# Altium PCB Markovic_Mario.PcbDoc
Units mm, origin at the board's own origin, x right, y up, seen from the top; angles counter-clockwise.
Board outline 76 x 70 mm, 2 copper layers (Top Layer, Bottom Layer); 37 components, 24 nets, 129 pads, 0 vias.
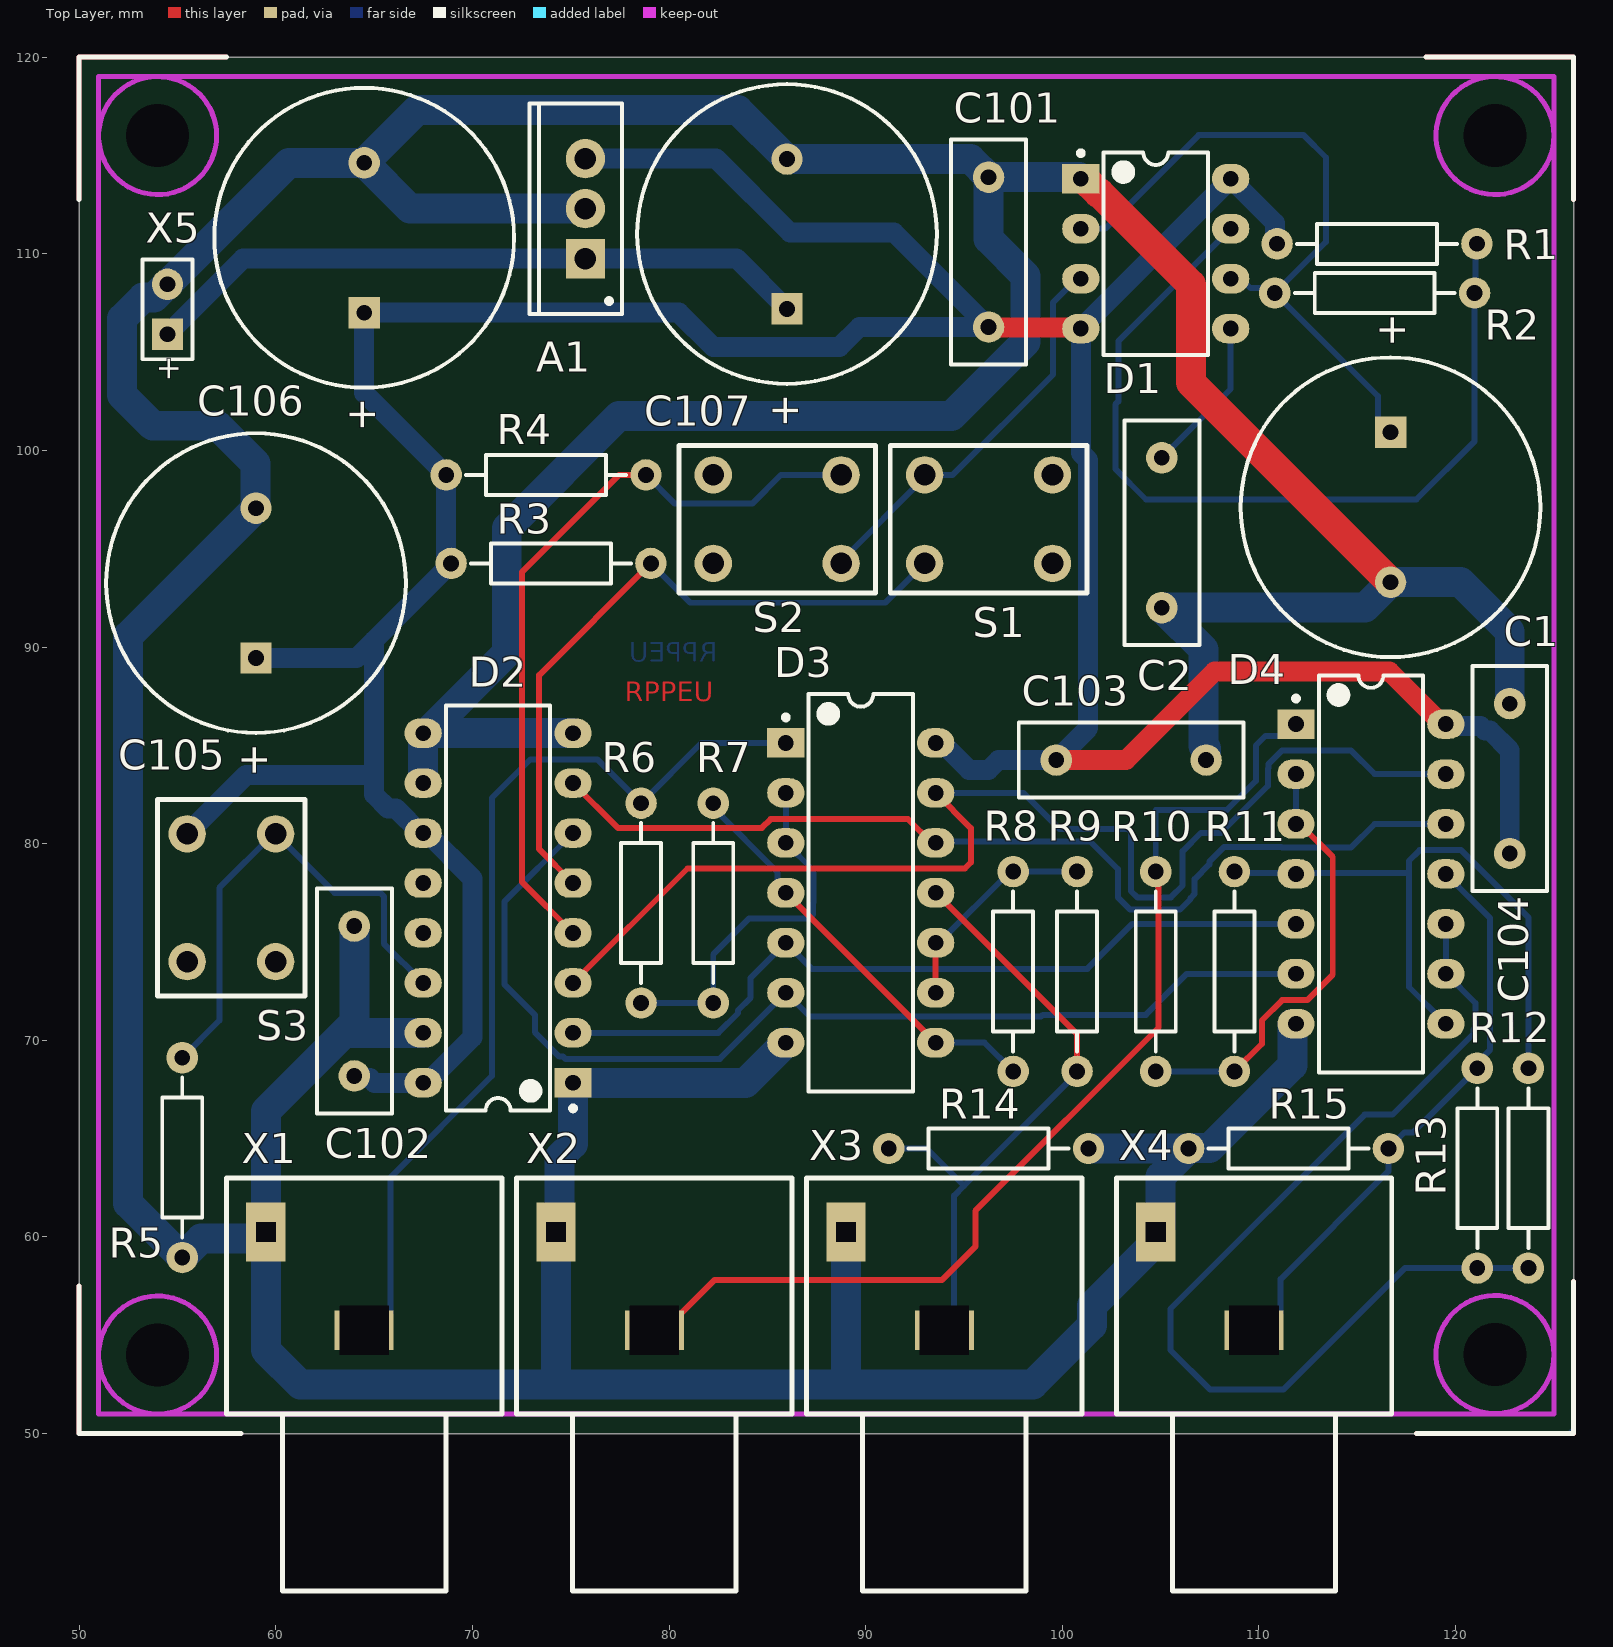
[diagram p0: Top Layer view]
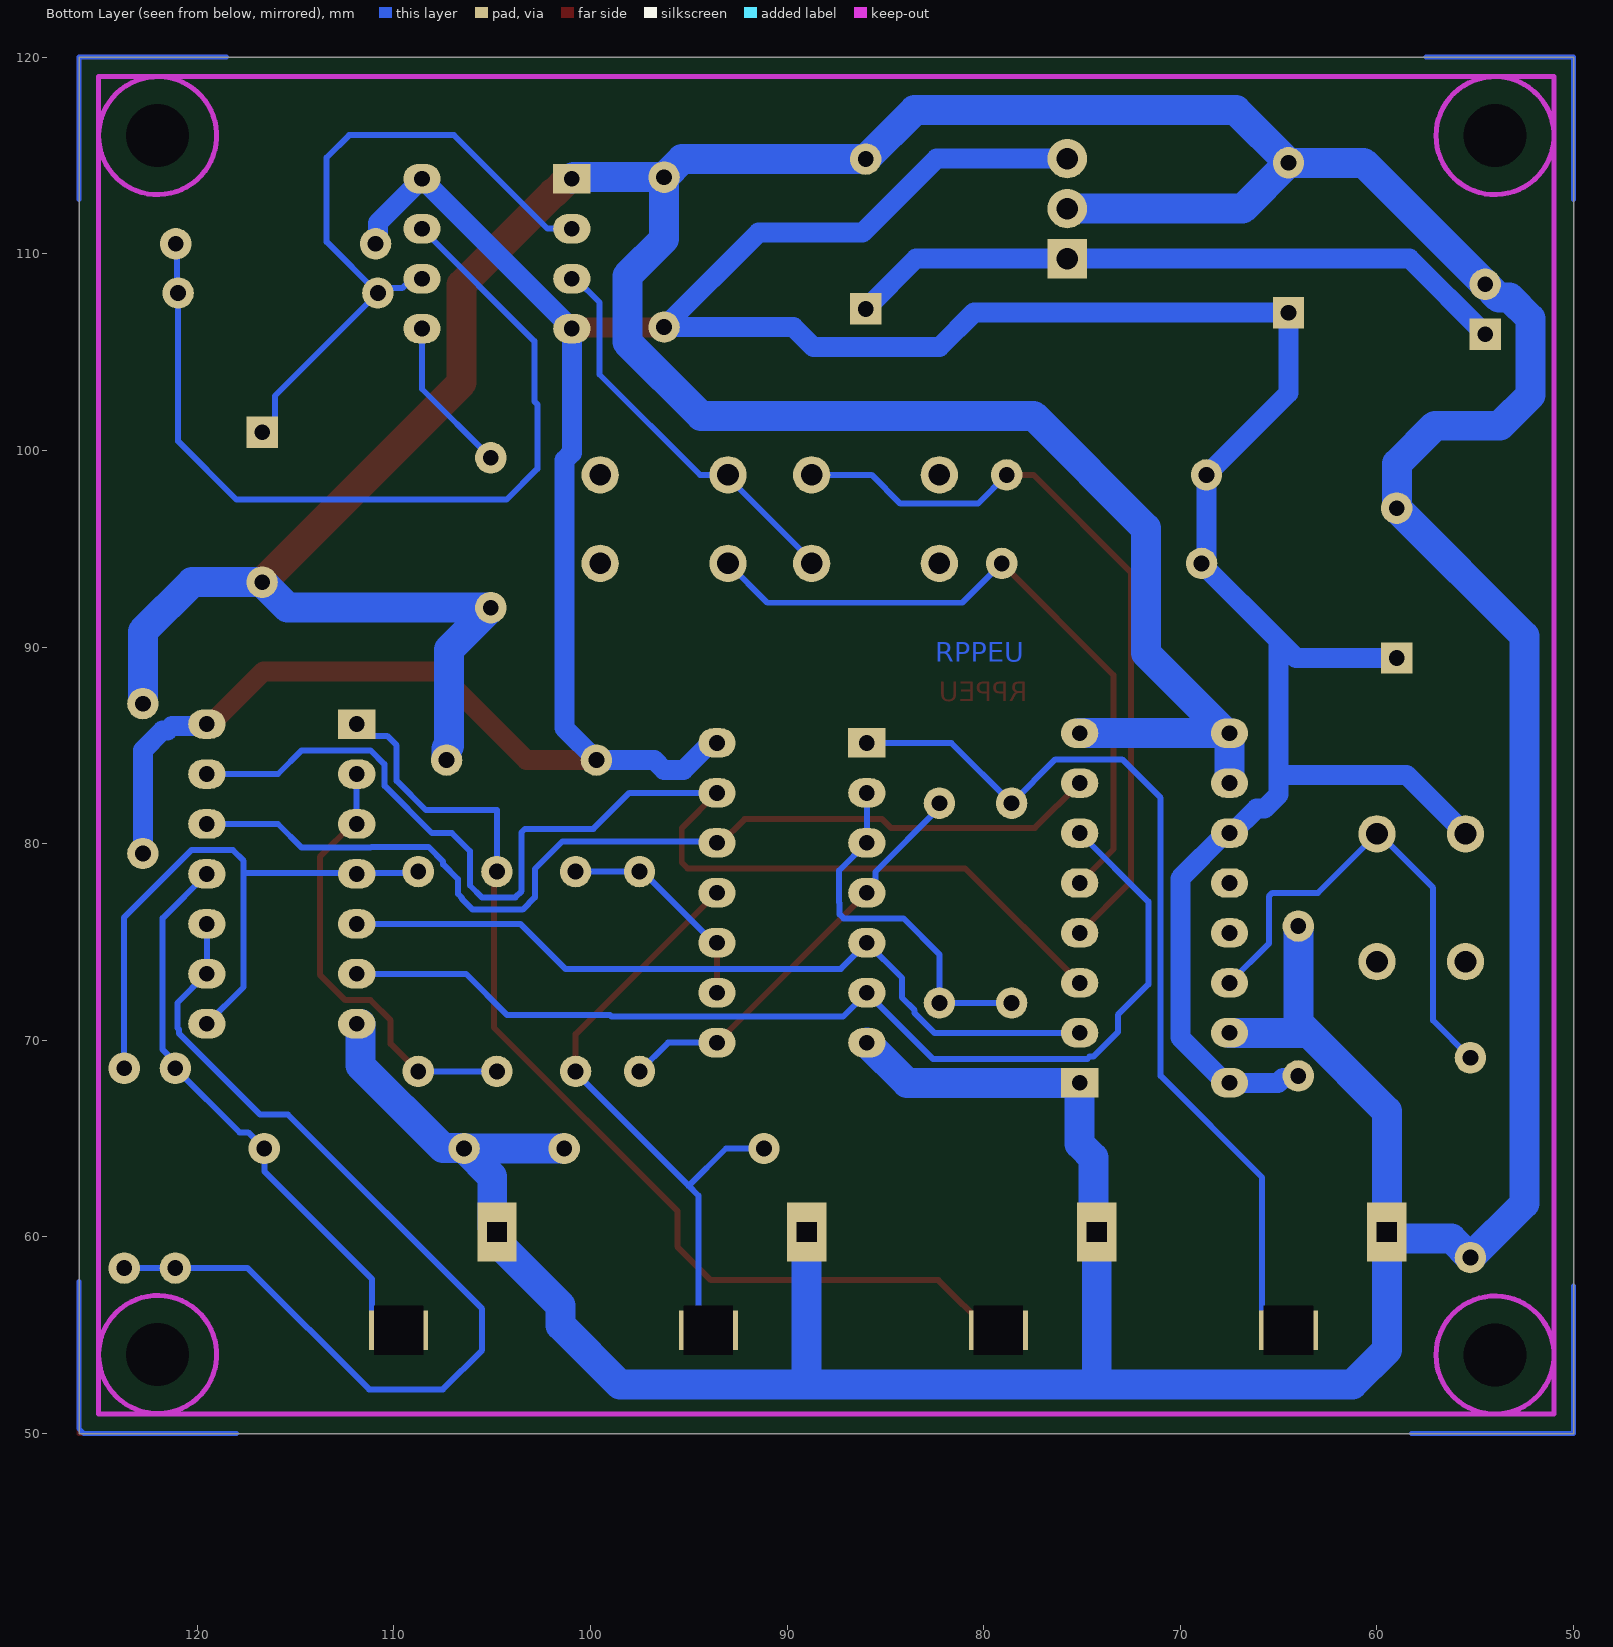
[diagram p1: Bottom Layer view, seen from below]

## Layer stack, top to bottom
Top Solder: solder mask 0.0102, Solder Resist, Dk 3.5
Top Layer: signal copper 0.0356
Dielectric 1: dielectric 0.32, FR-4, Dk 4.8
Bottom Layer: signal copper 0.0356
Bottom Solder: solder mask 0.0102, Solder Resist, Dk 3.5

## Board outline
50,50 50,120 126,120 126,50

## Design rules (kind name [scope] priority, off if disabled: settings)
Clearance [All] p1: gap=0.305 ignorepadtopadclearanceinfootprint=FALSE except(0: Arc-Hole Track-Hole SMDPad-Hole THPad-Hole Via-Hole Fill-Hole Poly-Hole Region-Hole Text-Hole)
HoleSize [All] p1: absolutevalues=TRUE maxlimit=3.2 minlimit=0.025 maxpercent=80.000 minpercent=20.000
MinimumSolderMaskSliver [All] p1: minsoldermaskwidth=0.051
PolygonConnect [All] p1: connectstyle=Relief reliefconductorwidth=0.254 reliefentries=4 polygonreliefangle="90 Angle" airgapwidth=0.254
RoutingVias [All] p1: holewidth=0.711 width=1.27 viastyle="Through Hole" minholewidth=0.711 minwidth=1.27 maxholewidth=0.711 maxwidth=1.27
SilkToSolderMaskClearance [IsPad] p1: minsilkscreentomaskgap=0.051 clearancetoexposedcopper=TRUE
SolderMaskExpansion [All] p1: expansion=0.102
Width [All] p1: maxlimit=1.524 minlimit=0.305 preferedwidth=0.305 minimp=50.000000 maximp=50.000000 favimp=50.000000
27 further rules are at their usual default settings.

## Components (designator, comment, footprint, x,y, rotation, side; value= is the part's Value field where it differs from the comment)
A1 "UA7805" TO-220AB 75.75,112.29 r90 top
C1 "1u/25V" RB7.6-15 116.688,97.104 r90 top value=1u
C2 "100n" RAD-0.3 105.06,95.81 r90 top
C101 "100n" RAD-0.3 96.25,110.08 r270 top
C102 "100n" RAD-0.3 64,72 r270 top
C103 "100n" RAD-0.3 103.5,84.25 r180 top
C104 "100n" RAD-0.3 122.75,83.31 r270 top
C105 "10u/Ta" RB7.6-15 59,93.25 r270 top value=10u
C106 "100u/Al" RB7.6-15 64.5,110.81 r270 top value=100u
C107 "330u/Al" RB7.6-15 86,111 r270 top value=330u
D1 "7555" DIP-8 104.75,110 r0 top
D2 "74193" DIP-16 71.31,76.73 r180 top
D3 "4066" DIP-14 89.75,77.5 r0 top
D4 "4066" DIP-14 115.69,78.46 r0 top
R1 "150K" AXIAL-0.4 116,110.5 r0 top
R2 "330K" AXIAL-0.4 115.882,108 r0 top
R3 "560" AXIAL-0.4 74,94.25 r180 top
R4 "560" AXIAL-0.4 73.75,98.75 r180 top
R5 "560" AXIAL-0.4 55.25,64.036 r90 top
R6 "1K" AXIAL-0.4 78.58,76.98 r90 top
R7 "2K" AXIAL-0.4 82.25,76.98 r270 top
R8 "4K7" AXIAL-0.4 97.5,73.5 r270 top
R9 "8K2" AXIAL-0.4 100.75,73.5 r90 top
R10 "1K" AXIAL-0.4 104.75,73.5 r90 top
R11 "2K" AXIAL-0.4 108.75,73.5 r270 top
R12 "4K7" AXIAL-0.4 123.7,63.5 r90 top
R13 "8K2" AXIAL-0.4 121.1,63.5 r270 top
R14 "4K7" AXIAL-0.4 96.25,64.5 r180 top
R15 "4K7" AXIAL-0.4 111.5,64.5 r0 top
S1 "UP" SWITCH 93,98.75 r0 top
S2 "DOWN" SWITCH 88.75,94.25 r180 top
S3 "RST" SWITCH 60,80.5 r270 top
X1 "INPUT" JACK 64.5,55.25 r90 top
X2 "INPUT" JACK 79.25,55.25 r90 top
X3 "OUTPUT" JACK 94,55.25 r90 top
X4 "OUTPUT" JACK 109.75,55.25 r90 top
X5 "Napajanje" BAT-2 54.5,107.17 r90 top

## Footprints (in the part's own frame and the unit in brackets; to place one, negate y for a bottom-side part, rotate by r counter-clockwise, add the part's x,y. Pads: shape width x height; smd on the part's side, far side on the other; paste and mask are expansions set on the pad)
AXIAL-0.4 [mm] "Axial Device, Thru-Hole; 2 Leads; 0.4 in Pin Spacing"
  round 1.6 hole 0.8: 1(-5.08,0) 2(5.08,0)
  silkscreen extent -4.06,-1.02 4.06,1.02
BAT-2 [mm] "Battery; 2 Leads"
  rect 1.6x1.6 hole 0.8: 1(-1.27,0)
  round 1.6 hole 0.8: 2(1.27,0)
  silkscreen extent -2.54,-1.27 2.54,1.27
DIP-8 [mm] "DIP; 8 Leads; Row Spacing 7.62 mm; Pitch 2.54 mm"
  rect 1.9x1.5 hole 0.8: 1(-3.81,3.81)
  oval 1.9x1.5 hole 0.8: 2(-3.81,1.27) 3(-3.81,-1.27) 4(-3.81,-3.81) 5(3.81,-3.81) 6(3.81,-1.27) 7(3.81,1.27) 8(3.81,3.81)
  silkscreen extent -3.93,-5.15 2.65,5.23, body extent -3.6,-5.15 3.6,5.15, height 5.08
DIP-14 [mm] "DIP; 14 Leads; Row Spacing 7.62 mm; Pitch 2.54 mm"
  rect 1.9x1.5 hole 0.8: 1(-3.81,7.62)
  oval 1.9x1.5 hole 0.8: 2(-3.81,5.08) 3(-3.81,2.54) 4(-3.81,0) 5(-3.81,-2.54) 6(-3.81,-5.08) 7(-3.81,-7.62) 8(3.81,-7.62) 9(3.81,-5.08) 10(3.81,-2.54) 11(3.81,0) 12(3.81,2.54) 13(3.81,5.08) 14(3.81,7.62)
  silkscreen extent -3.93,-10.1 2.65,10.1, body extent -3.6,-10.1 3.6,10.1, height 5.08
DIP-16 [mm] "DIP; 16 Leads; Row Spacing 7.62 mm; Pitch 2.54 mm"
  rect 1.9x1.5 hole 0.8: 1(-3.81,8.89)
  oval 1.9x1.5 hole 0.8: 2(-3.81,6.35) 3(-3.81,3.81) 4(-3.81,1.27) 5(-3.81,-1.27) 6(-3.81,-3.81) 7(-3.81,-6.35) 8(-3.81,-8.89) 9(3.81,-8.89) 10(3.81,-6.35) 11(3.81,-3.81) 12(3.81,-1.27) 13(3.81,1.27) 14(3.81,3.81) 15(3.81,6.35) 16(3.81,8.89)
  silkscreen extent -3.94,-10.3 2.65,10.31, body extent -3.6,-10.28 3.6,10.28, height 5.08
JACK [mm]
  rect 2x3 hole 2.5 square: 1(0,0)
  rect 3x2 hole 1 square: 2(5,5)
  silkscreen extent -13.25,-7 7.75,7
RAD-0.3 [mm] "Radial Cap, Thru-Hole; 2 Leads; 0.3 in Pin Spacing"
  round 1.6 hole 0.8: 1(-3.81,0) 2(3.81,0)
  silkscreen extent -5.71,-1.91 5.71,1.91
RB7.6-15 [mm] "Polarized Capacitor (Radial); 2 Leads"
  rect 1.6x1.6 hole 0.8: 1(3.81,0)
  round 1.6 hole 0.8: 2(-3.81,0)
  silkscreen extent -7.62,-7.62 7.62,7.62
SWITCH [mm]
  round 1.9 hole 1.1: 1(0,0) 2(0,-4.5) 3(6.5,0) 4(6.5,-4.5)
  silkscreen extent -1.75,-6 8.25,1.5
TO-220AB [mm] "TO, Thru-Hole, Vertical, Heatsink Mounted; 3 In-Line Leads; Pitch 2.54 mm"
  rect 2x2 hole 1.1: 1(-2.54,0)
  round 2 hole 1.1: 2(0,0) 3(2.54,0)
  silkscreen extent -5.35,-1.85 5.35,2.85, body extent -5.4,-1.9 5.4,2.9, height 19.3

## Part data
A1: library part "Volt Reg", "Voltage Regulator", Cijena="4.68 kn", Katalog dobavljaèa=Farnell, Kataloški broj=2075448, Opis komponente="Linear Voltage Regulator, 7805, Fixed, 7V To 25V In, 5V And 1.5A Out", PackageReference=D2PAK, Proizvoðaè="TEXAS INSTRUMENTS"
C1: library part "Cap Pol1", "Polarized Capacitor (Radial)", Cijena="2.73 kn", Katalog dobavljaèa=Farnell, Kataloški broj=3322208, Opis komponente="CERAMIC CAPACITOR, 1UF, 25V, Y5V, +80,-20%, RADIAL", PackageReference=RB7.6-15, Proizvoðaè=VISHAY
C2 C101 C102 C103 C104: library part Cap, "Capacitor", Cijena="2.06 kn", Katalog dobavljaèa=Farnell, Kataloški broj=1457699, Opis komponente="Multilayer Ceramic Capacitor, Gold Max, 0.1 µF, 50 V, Goldmax, 300 Series, ± 10%, Radial Leaded", PackageReference=RAD-0.3, Proizvoðaè=KEMET
C105 C106 C107: library part "Elektrolitski kondenzator", Katalog dobavljaèa=Farnell
  C105: Cijena="5.35 kn", Kataloški broj=9708200, Opis komponente="Tantalum Capacitor, Epoxy-Coated, 10 µF, 6.3 V, MCCB Series, ± 20%, Radial Leaded, 5.1 mm", Proizvoðaè=MULTICOMP
  C106: Cijena="1.77 kn", Kataloški broj=2068653, Opis komponente="SMD Aluminium Electrolytic Capacitor, Radial Can - SMD, 100 µF, 16 V, EDK Series", Proizvoðaè=KEMET
  C107: Cijena="5.25 kn", Kataloški broj=9695796, Opis komponente="SMD Aluminium Electrolytic Capacitor, Radial Can - SMD, 330 µF, 25 V, FK Series", Proizvoðaè=PANASONIC
R1 R2 R3 R4 R5 R6 R7 R8 R9 R10 R11 R12 R13 R14 R15: library part Res2, "Resistor", Cijena="0.26 kn", Katalog dobavljaèa=Farnell, PackageReference=AXIAL-0.4, Proizvoðaè=MULTICOMP
  R1: Kataloški broj=9341340, Opis komponente="Through Hole Resistor, 150 kohm, MF25 Series, 250 mW, ± 1%, Axial Leaded, 250 V"
  R2: Kataloški broj=9341765, Opis komponente="Through Hole Resistor, 330 kohm, MF25 Series, 250 mW, ± 1%, Axial Leaded, 250 V"
  R3 R4 R5: Kataloški broj=9342052, Opis komponente="Through Hole Resistor, 560 ohm, MF25 Series, 250 mW, ± 1%, Axial Leaded, 250 V"
  R6 R10: Kataloški broj=9341102, Opis komponente="Through Hole Resistor, 1 kohm, MF25 Series, 250 mW, ± 1%, Axial Leaded, 250 V"
  R7 R11: Kataloški broj=9341480, Opis komponente="Through Hole Resistor, 2 kohm, MF25 Series, 250 mW, ± 1%, Axial Leaded, 250 V"
  R8 R12 R14 R15: Kataloški broj=9341951, Opis komponente="Through Hole Resistor, 4.7 kohm, MF25 Series, 250 mW, ± 1%, Axial Leaded, 250 V"
  R9 R13: Kataloški broj=9342273, Opis komponente="Through Hole Resistor, 8.2 kohm, MF25 Series, 250 mW, ± 1%, Axial Leaded, 250 V"
S1 S2 S3: library part SW-PB, "Switch", Cijena="1.21 kn", Katalog dobavljaèa=Farnell, Kataloški broj=9471731, Opis komponente="Tactile Switch, MCDTS6 Series, Top Actuated, Through Hole, Round Button, 160 gf, 50mA at 12VDC", PackageReference=SPST-2, Proizvoðaè=MULTICOMP
X1 X2 X3 X4: library part Konektor, Cijena="4.41 kn", Katalog dobavljaèa=Farnell, Kataloški broj=2817595, Opis komponente="RCA (Phono) Audio / Video Connector, PCB, 1 Position, 2 Contacts, Jack", Proizvoðaè="CLIFF ELECTRONIC COMPONENTS"
X5: library part "Header 2", "Header, 2-Pin", Cijena="4.53 kn", Katalog dobavljaèa=Farnell, Kataloški broj=2112482, Opis komponente="Wire-To-Board Terminal Block, 2.54 mm, 2 Ways, 30 AWG, 16 AWG, 1.4 mm2", Proizvoðaè="BUCHANAN - TE CONNECTIVITY"
D1: Cijena="7.05 kn", Katalog dobavljaèa=Farnell, Kataloški broj=1564692, Opis komponente="Timer, Oscillator & Pulse Generator IC", Proizvoðaè="TEXAS INSTRUMENTS"
D2: Cijena="3.14 kn", Katalog dobavljaèa=Farnell, Kataloški broj=1470793, Opis komponente="Binary Synchronous Up / Down Counter", Proizvoðaè="TEXAS INSTRUMENTS"
D3 D4: Cijena="3.51 kn", Katalog dobavljaèa=Farnell, Kataloški broj=2136906, Opis komponente="ANALOG SWITCH", Proizvoðaè="TEXAS INSTRUMENTS"

## Free pads (board coordinates)
  round 3 hole 3.2: 0(54,54) 0(54,116) 0(122,54.025) 0(122,116)

## Nets (pads, with @x,y where several pads share a name; then routed paths per layer and width w, separated by ;. In a path a pad name is that pad's centre, name@x,y a point inside that pad or via, vN(x,y) a via of type N, cw(c..) or ccw(c..) an arc to the next point about the centre after c; other vN are vias at no path point)
A: D2.3 D3.13 D4.13 | length 62.2
  Top Layer w0.305: D2.3 80.94,78.74 95.047,78.74 95.352,79.045 95.352,80.788 D3.13
  Bottom Layer w0.305: D3.13 98.014,82.58 99.844,80.75 103.321,80.75 103.5,80.571 103.5,79.108 103.493,79.101 103.493,77.584 103.81,77.267 105.517,77.267 106.121,77.871 106.121,79.621 107.04,80.54 108.057,80.54 110.46,82.943 110.46,83.827 110.473,83.84 110.473,84.04 111.18,84.747 114.675,84.747 115.882,83.54 D4.13
B: D2.2 D3.5 D4.5 | length 40.8
  Bottom Layer w0.305: D2.2 82.508,70.38 83.507,71.379 83.507,71.521 84.153,72.167 84.153,73.173 D3.5 87.265,73.635 101.27,73.635 103.555,75.92 D4.5
C: D2.6 D3.6 D4.6 | length 54.3
  Bottom Layer w0.305: D2.6 71.628,77.048 71.628,72.847 73.179,71.296 73.179,70.414 74.42,69.173 74.62,69.173 74.73,69.063 82.583,69.063 D3.6 87.147,71.213 98.924,71.213 99.009,71.298 104.242,71.298 106.324,73.38 D4.6
D: D2.7 D3.12 D4.12 | length 50.7
  Top Layer w0.305: D2.7 77.397,80.803 84.722,80.803 85.167,81.247 92.153,81.247 93.36,80.04 D3.12
  Bottom Layer w0.305: D3.12 93.632,80.112 101.422,80.112 102.819,78.715 102.819,77.267 103.446,76.64 105.981,76.64 106.517,77.176 106.517,77.231 106.731,77.445 106.731,78.197 107.48,78.947 107.48,79.088 108.229,79.837 111.136,79.837 111.18,79.793 114.675,79.793 115.882,81 D4.12
GND: A1.2 C1.2 C2.1 C101.1 C102.1 C103.1 C104.1 C105.2 C106.2 C107.2 D1.1 D2.1 D2.8 D2.9 D2.10 D2.15 D3.7 D4.7 R5.1 R14.1 R15.1 X1.2 X2.2 X3.2 X4.2 X5.2 | length 380.4
  Top Layer w1.524: D1.1 101.116,113.81 101.839,113.087 101.893,113.087 106.543,108.436 106.543,103.439 C1.2
  Bottom Layer w1.524: C102.1 64,70.9 63.48,70.38 ; D2.15 63.48,70.38 ; D2.10 D2.9 D2.9@67.676,85.62 ; D2.8 D2.9@67.676,85.62 ; A1.2 66.83,112.29 C106.2 ; D3.7 83.9,67.84 D2.1 75.12,64.73 74.426,64.036 74.426,60.426 X2.2 74.25,52.5 ; X3.2 89,52.5 ; D1.1 100.86,113.89 C101.1 ; R14.1 R15.1 ; C103.1 107.31,84.829 107.175,84.964 107.175,89.885 C2.1 115.393,92 C1.2 120.25,93.294 122.75,90.794 C104.1 ; D4.7 111.704,70.84 111.692,70.828 111.692,68.722 107.485,64.515 106.435,64.515 R15.1 ; X1.2@59.5,60.158 X1.2 59.5,66.4 63.48,70.38 ; X1.2@59.5,60.158 59.5,54.25 61.25,52.5 74.25,52.5 ; X1.2@59.5,60.158 59.262,59.92 56.214,59.92 R5.1 52.5,61.706 52.5,90.56 C105.2 58.985,97.075 58.985,99.325 57.06,101.25 53.75,101.25 52.194,102.806 52.194,106.702 53.258,107.767 53.806,107.767 54.479,108.44 X5.2 60.68,114.62 C106.2 ; C106.2 67.18,117.3 83.51,117.3 C107.2 95.33,114.81 C101.1 ; D2.9@67.676,85.62 71.75,89.694 71.75,96.04 77.46,101.75 94.37,101.75 98.117,105.497 98.117,108.876 96.25,110.743 C101.1 ; 74.25,52.5 89,52.5 ; 89,52.5 98.5,52.5 101.506,55.506 101.506,56.506 104.75,59.75 X4.2 104.988,60.488 104.988,63.068 R15.1
NetA1_1: A1.1 C107.1 X5.1 | length 34.2
  Bottom Layer w1.016: X5.1 58.35,109.75 A1.1 83.44,109.75 C107.1
NetC1_1: C1.1 D1.2 D1.6 R2.1 | length 34.9
  Bottom Layer w0.305: D1.2 102.177,111.27 106.934,116.027 112.268,116.027 113.404,114.891 113.404,110.602 R2.1 ; D1.6 109.083,108.73 109.566,108.248 110.554,108.248 R2.1 ; C1.1 116.04,101.562 116.04,102.762 R2.1
NetC2_2: C2.2 D1.5 | length 8
  Bottom Layer w0.305: C2.2 108.56,103.12 D1.5
NetD1_3: D1.3 S1.1 S2.1 | length 20.5
  Bottom Layer w0.305: S2.1 88.75,94.375 93,98.625 S1.1 94.425,98.75 99.533,103.857 99.533,107.523 100.74,108.73 D1.3
NetD1_7: D1.7 R1.2 R2.2 | length 44.9
  Bottom Layer w0.305: D1.7 102.845,105.555 102.845,102.489 102.692,102.337 102.692,99.06 104.252,97.5 118,97.5 120.962,100.462 R2.2 121.021,108.059 121.021,110.441 R1.2
NetD2_4: D2.4 R4.1 S2.2 | length 38.9
  Top Layer w0.305: D2.4 72.517,78.063 72.517,93.802 77.465,98.75 R4.1
  Bottom Layer w0.305: R4.1 80.287,97.293 84.24,97.293 85.697,98.75 S2.2
NetD2_5: D2.5 R3.1 S1.2 | length 34.9
  Top Layer w0.305: D2.5 73.4,79.72 73.4,88.57 R3.1
  Bottom Layer w0.305: R3.1 81.08,92.25 91,92.25 S1.2
NetD2_14: D2.14 R5.2 S3.1 | length 25.5
  Bottom Layer w0.305: R5.2 57.14,71.006 57.14,77.75 59.89,80.5 S3.1 63,77.5 65.321,77.5 65.5,77.321 65.5,74.92 D2.14
NetD3_1: D3.1 R6.2 X1.1 | length 48
  Bottom Layer w0.305: X1.1 65,55.25 65.848,56.098 65.848,63.038 71,68.19 71,82.33 72.957,84.287 76.353,84.287 R6.2 81.64,85.12 D3.1
NetD3_2: D3.2 D3.3 R6.1 R7.2 | length 18.8
  Bottom Layer w0.305: R6.1 R7.2 82.25,74.376 84.074,76.2 87.122,76.2 87.325,76.403 87.325,76.978 87.347,77 87.347,78.633 D3.3 D3.2
NetD3_4: D3.4 D3.8 R7.1 R8.2 | length 21.4
  Top Layer w0.305: D3.4 D3.8
  Bottom Layer w0.305: R7.1 82.25,81.823 85.511,78.561 85.511,77.929 D3.4 ; D3.8 96.04,69.88 R8.2
NetD3_9: D3.9 D3.10 R8.1 R9.2 | length 11.2
  Top Layer w0.305: D3.9 D3.10
  Bottom Layer w0.305: D3.10 93.72,74.96 97.34,78.58 R8.1 R9.2
NetD3_11: D3.11 R9.1 R14.2 X3.1 | length 32.6
  Top Layer w0.305: D3.11 100.75,70.31 R9.1
  Bottom Layer w0.305: R14.2 93.1,64.5 95,62.6 ; X3.1 94.5,55.75 94.5,62.1 95,62.6 ; R9.1 100.75,68.35 95,62.6
NetD4_1: D4.1 R10.2 X2.1 | length 54.2
  Top Layer w0.305: X2.1 79.75,55.25 82.305,57.805 93.873,57.805 95.58,59.512 95.58,61.328 104.902,70.65 104.902,78.428 R10.2
  Bottom Layer w0.305: R10.2 104.75,81.71 108.365,81.71 109.85,83.195 109.85,85 110.332,85.482 111.282,85.482 D4.1
NetD4_2: D4.2 D4.3 R10.1 R11.2 | length 22.8
  Top Layer w0.305: R11.2 110.152,69.822 110.152,71.019 111.18,72.047 112.454,72.047 113.75,73.343 113.75,79.33 112.08,81 D4.3
  Bottom Layer w0.305: R10.1 R11.2 ; D4.3 D4.2
NetD4_4: D4.4 D4.8 R11.1 R12.2 | length 33.4
  Bottom Layer w0.305: R11.1 108.81,78.52 111.82,78.52 D4.4 111.92,78.5 117.626,78.5 ; D4.8 117.626,72.714 117.626,78.5 ; R12.2 123.7,76.25 120.283,79.667 118.167,79.667 117.626,79.126 117.626,78.5
NetD4_9: D4.9 D4.10 R12.1 R13.2 | length 51.1
  Bottom Layer w0.305: D4.10 D4.9 119.52,73.38 121,71.9 121,70.633 120.907,70.54 120.907,70.34 116.787,66.22 115.37,66.22 105.5,56.35 105.5,54.25 107.5,52.25 111.25,52.25 117.42,58.42 R13.2 R12.1
NetD4_11: D4.11 R13.1 R15.2 X4.1 | length 29.7
  Bottom Layer w0.305: X4.1 110.25,55.25 111.098,56.098 111.098,57.86 116.58,63.343 R15.2 117.398,65.318 117.838,65.318 R13.1 121.1,68.876 121.75,69.526 121.75,76.21 D4.11
VCC: A1.3 C101.2 C102.2 C103.2 C104.2 C105.1 C106.1 D1.4 D1.8 D2.11 D2.16 D3.14 D4.14 R1.1 R3.2 R4.2 S3.2 | length 205.4
  Top Layer w1.016: C101.2 96.285,106.235 100.895,106.235 D1.4 ; C103.2 103.242,84.25 107.742,88.75 116.63,88.75 119.3,86.08 D4.14
  Bottom Layer w1.016: S3.2 58.5,83.5 65,83.5 ; C105.1 64.11,89.44 65,90.33 ; C102.2 64.112,68.078 64.788,68.078 65.026,67.84 D2.16 67.7,67.84 70,70.14 70,78.24 67.7,80.54 D2.11 67.369,80.54 66.127,81.782 65.718,81.782 65,82.5 65,83.5 ; 64.94,89.44 65,89.5 ; A1.3 82.4,114.83 86.15,111.08 91.44,111.08 C101.2 89.681,106.27 88.661,105.25 82.25,105.25 80.5,107 C106.1 64.5,102.92 R4.2 68.67,94.604 68.92,94.354 R3.2 65,90.33 ; D3.14 93.891,85.12 95.261,83.75 96.25,83.75 96.75,84.25 C103.2 101.313,85.873 101.313,99.501 100.94,99.874 D1.4 D1.8 108.629,113.81 108.853,113.586 108.853,113.517 110.808,111.562 110.808,110.612 R1.1 ; D4.14 119.593,85.987 121.263,85.987 121.5,85.75 121.75,85.75 122.75,84.75 C104.2 ; 65,83.5 65,89.5 ; 65,89.5 65,90.33
pads on no net: D2.12 D2.13 S1.3 S1.4 S2.3 S2.4 S3.3 S3.4
copper on no net: | length 129.1
  Top Layer w0.254: 50,57.5 50,50 58.25,50 ; 50,112.75 50,120 57.5,120 ; 118,50 126,50 126,57.75 ; 118.5,120 126,120 126,112.75
  Bottom Layer w0.254: 50,57.5 50,50 58.25,50 ; 50,112.75 50,120 57.5,120 ; 118,50 125.75,50 126,50.25 126,57.75 ; 118.5,120 126,120 ; 126,120 126,112.75 126,120

## Keep-outs
Keep-Out Layer:
  circle w0.254: c122,116 r3
  circle w0.254: c122,54.025 r3
  circle w0.254: c54,116 r3
  circle w0.254: c54,54 r3
  lines w0.254: 51,51 125,51 125,119 51,119 51,51

## Other copper
Top Layer:
  text "RPPEU" at 77.75,87.25 h1
Bottom Layer:
  text "RPPEU" at 82.47,89.25 h1

## Silkscreen, mask and mechanical layers (free items; w line width, h text height)
Top Overlay:
  lines w0.254: 50,57.5 50,50 58.25,50 ; 50,112.75 50,120 57.5,120 ; 118,50 126,50 126,57.75 ; 118.5,120 126,120 126,112.75
Mechanical 1:
  lines w0.254: 50,50 126,50 126,120 50,120 50,50 ; 160,120 160,120
Drill Drawing:
  text ".Legend" at 138,63.25 h1

## Dimensions
126,120 to 126,50 on Mechanical 2
50,50 to 126,50 on Mechanical 2

## Text inside footprints (layer, text, board x,y; h text height)
C1: Top Overlay "+" at 117.424,105.236 h1.5 r90
C105: Top Overlay "+" at 58.263,85.118 h1.5 r270
C106: Top Overlay "+" at 63.763,102.678 h1.5 r270
C107: Top Overlay "+" at 85.263,102.868 h1.5 r270
X5: Top Overlay "+" at 55.077,103.5 h1.15 r90